# Altium PCB cal-boards-panelization1.PcbDoc
Units mm, origin at the board's own origin, x right, y up, seen from the top; angles counter-clockwise.
Board outline 207 x 174 mm, 4 copper layers (Top Layer, Mid-Layer 1, Mid-Layer 2, Bottom Layer), stack 1.105 mm thick; 6 components, 0 nets, 1432 pads, 0 vias.
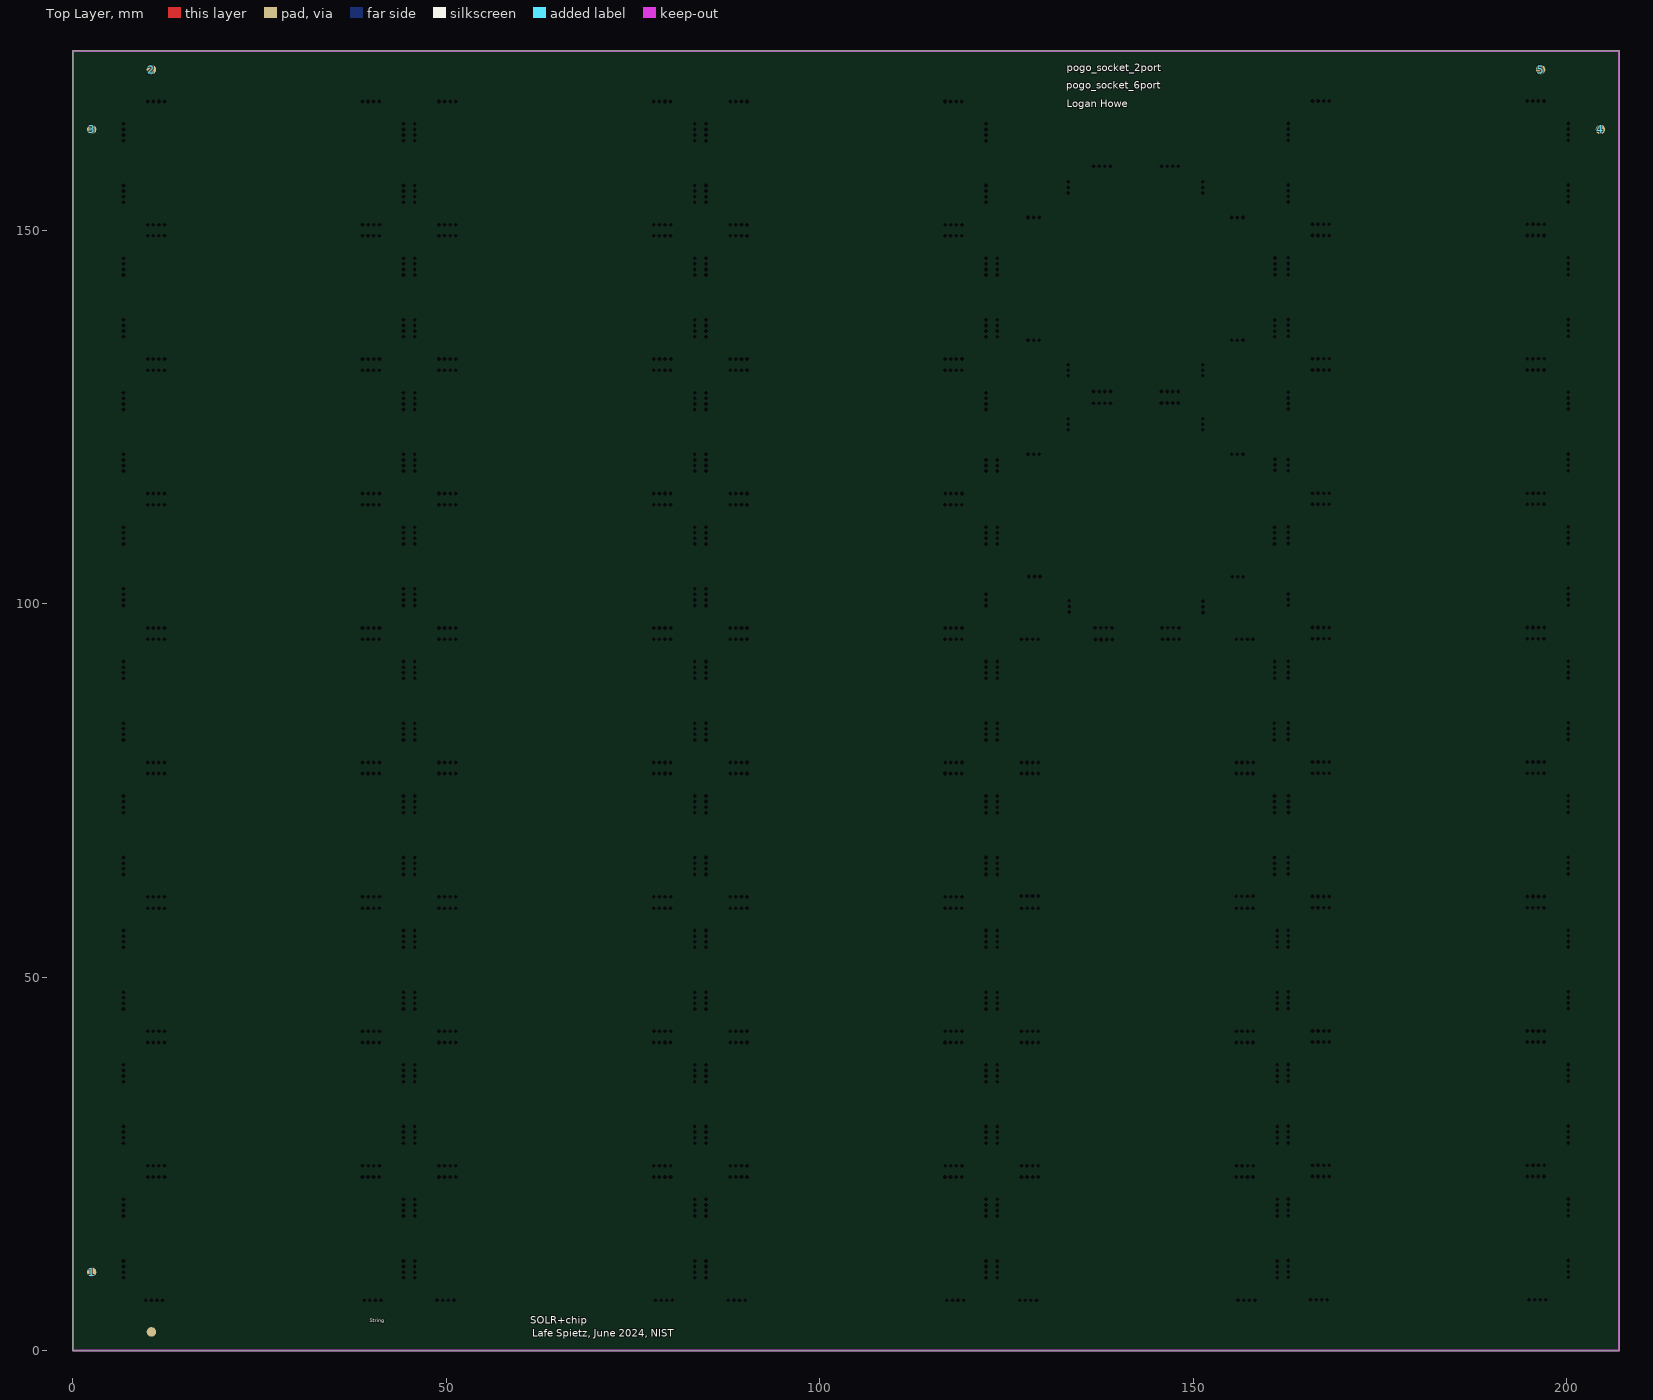
[diagram p0: Top Layer view]
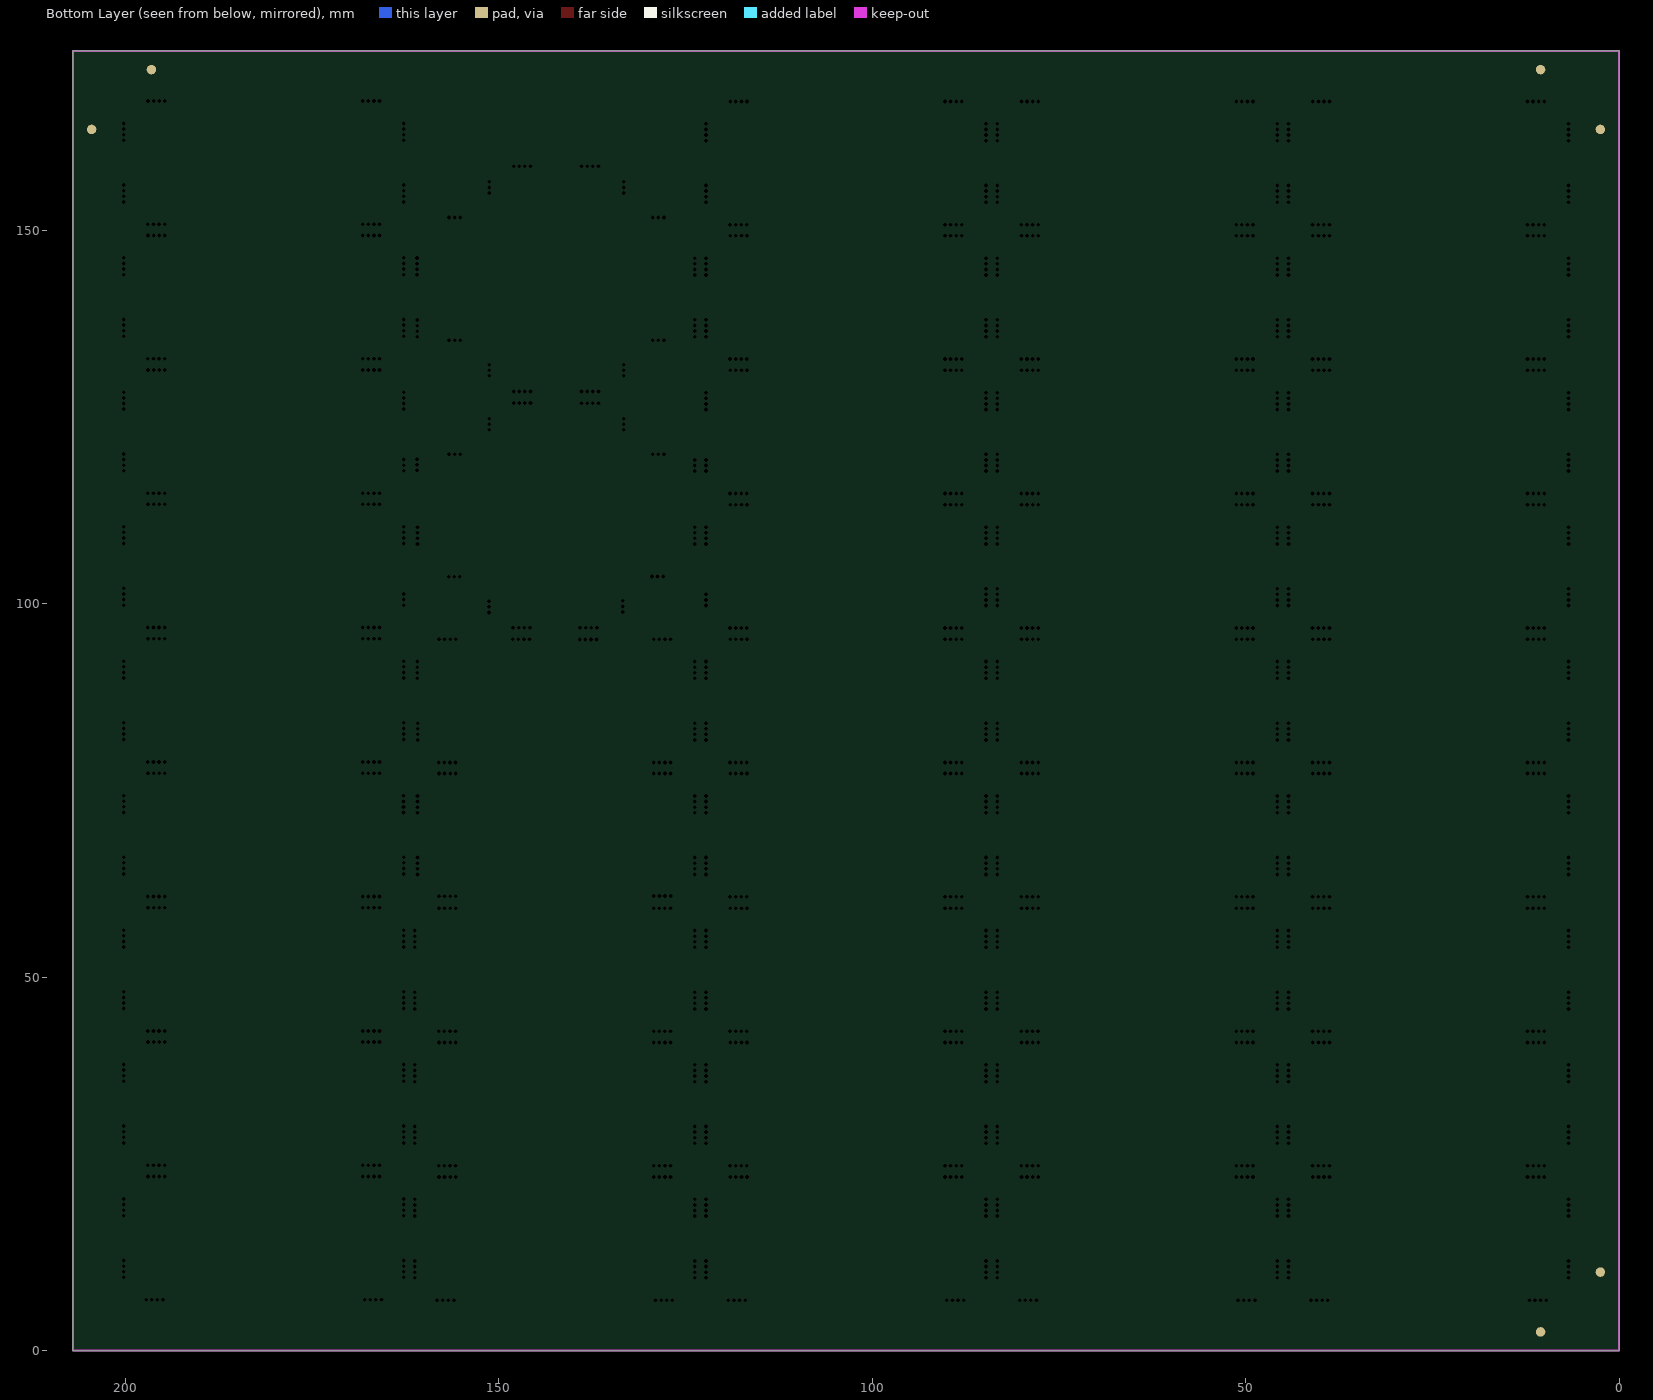
[diagram p1: Bottom Layer view, seen from below]

## Layer stack, top to bottom
Top Solder: solder mask 0.0254, SM-001, Dk 4
Top Layer: signal copper 0.035
Core1: dielectric 0.254, RO4350B, Dk 3.48
Mid-Layer 1: signal copper 0.035
Dielectric 1: prepreg 0.1778, PR7628, Dk 4.24
Dielectric 2: prepreg 0.1016, PR2116, Dk 4.17
Dielectric 3: prepreg 0.1778, PR7628, Dk 4.24
Mid-Layer 2: signal copper 0.035
Core2: dielectric 0.254, RO-4350B, Dk 3.48
Bottom Layer: signal copper 0.035
Bottom Solder: solder mask 0.0254, SM-001, Dk 4

## Board outline
0,0 0,174 207,174 207,0

## Design rules (kind name [scope] priority, off if disabled: settings)
Clearance [All] p1: gap=0.254 ignorepadtopadclearanceinfootprint=FALSE
PolygonConnect [All] p1: connectstyle=Relief reliefconductorwidth=0.254 reliefentries=4 polygonreliefangle="90 Angle" airgapwidth=0.254
RoutingVias [All] p1: holewidth=0.711 width=1.27 viastyle="Through Hole" minholewidth=0.711 minwidth=1.27 maxholewidth=0.711 maxwidth=1.27
SolderMaskExpansion [All] p1: expansion=0.102 istentingtop=FALSE
Width [All] p1: maxlimit=0.254 minlimit=0.254 preferedwidth=0.254
30 further rules are at their usual default settings.

## Components (designator, comment, footprint, x,y, rotation, side; value= is the part's Value field where it differs from the comment)
1 "Fiducial" fiducial 2.5,10.5 r0 top
2 "Fiducial" fiducial 10.5,171.5 r0 top
3 "Fiducial" fiducial 2.5,163.5 r0 top
4 "Fiducial" fiducial 204.5,163.5 r0 top
5 "Fiducial" fiducial 196.5,171.5 r0 top
? "Fiducial" fiducial 10.5,2.5 r0 top

## Footprints (in the part's own frame and the unit in brackets; to place one, negate y for a bottom-side part, rotate by r counter-clockwise, add the part's x,y. Pads: shape width x height; smd on the part's side, far side on the other; paste and mask are expansions set on the pad)
fiducial [mm]
  round 1.27 / inner round 0 / far side round 1.27 all layers, no hole paste-2539.97 mask+1.27: 1(0,0)

## Free pads (board coordinates)
  round 0 hole 0.5 unplated: 6(6.75,9.75) 6(6.75,10.5) 6(6.75,11.25) 6(6.75,12) 6(6.75,18) 6(6.75,18.75) 6(6.75,19.5) 6(6.75,20.25) 6(6.75,27.75) 6(6.75,28.5) 6(6.75,29.25) 6(6.75,30) 6(6.75,36) 6(6.75,36.75) 6(6.75,37.5) 6(6.75,38.25) 6(6.75,63.75) 6(6.75,64.5) 6(6.75,65.25) 6(6.75,66) 6(6.75,72) 6(6.75,72.75) 6(6.75,73.5) 6(6.75,74.25) 6(6.75,81.75) 6(6.75,82.5) 6(6.75,83.25) 6(6.75,84) 6(6.75,90) 6(6.75,90.75) 6(6.75,91.5) 6(6.75,92.25) 6(6.75,99.75) 6(6.75,100.5) 6(6.75,101.25) 6(6.75,102) 6(6.75,108) 6(6.75,108.75) 6(6.75,109.5) 6(6.75,110.25) 6(6.75,117.75) 6(6.75,118.5) 6(6.75,119.25) 6(6.75,120) 6(6.75,126) 6(6.75,126.75) 6(6.75,127.5) 6(6.75,128.25) 6(6.75,135.75) 6(6.75,136.5) 6(6.75,137.25) 6(6.75,138) 6(6.75,144) 6(6.75,144.75) 6(6.75,145.5) 6(6.75,146.25) 6(6.751,153.741) 6(6.751,154.491) 6(6.751,155.241) 6(6.751,155.991) 6(6.751,161.991) 6(6.751,162.741) 6(6.751,163.491) 6(6.751,164.241) 6(6.754,45.733) 6(6.754,46.483) 6(6.754,47.233) 6(6.754,47.983) 6(6.754,53.983) 6(6.754,54.733) 6(6.754,55.483) 6(6.754,56.233) 6(9.75,6.75) 6(10,23.25) 6(10,24.75) 6(10,41.25) 6(10,60.75) 6(10,77.25) 6(10,78.75) 6(10,95.25) 6(10,96.75) 6(10,113.25) 6(10,114.75) 6(10,131.25) 6(10,132.75) 6(10,149.25) 6(10.001,150.741) 6(10.001,167.241) 6(10.004,42.733) 6(10.004,59.233) 6(10.5,6.75) 6(10.75,23.25) 6(10.75,24.75) 6(10.75,41.25) 6(10.75,60.75) 6(10.75,77.25) 6(10.75,78.75) 6(10.75,95.25) 6(10.75,96.75) 6(10.75,113.25) 6(10.75,114.75) 6(10.75,131.25) 6(10.75,132.75) 6(10.75,149.25) 6(10.751,150.741) 6(10.751,167.241) 6(10.754,42.733) 6(10.754,59.233) 6(11.25,6.75) 6(11.5,23.25) 6(11.5,24.75) 6(11.5,41.25) 6(11.5,60.75) 6(11.5,77.25) 6(11.5,78.75) 6(11.5,95.25) 6(11.5,96.75) 6(11.5,113.25) 6(11.5,114.75) 6(11.5,131.25) 6(11.5,132.75) 6(11.5,149.25) 6(11.501,150.741) 6(11.501,167.241) 6(11.504,42.733) 6(11.504,59.233) 6(12,6.75) 6(12.25,23.25) 6(12.25,24.75) 6(12.25,41.25) 6(12.25,60.75) 6(12.25,77.25) 6(12.25,78.75) 6(12.25,95.25) 6(12.25,96.75) 6(12.25,113.25) 6(12.25,114.75) 6(12.25,131.25) 6(12.25,132.75) 6(12.25,149.25) 6(12.251,150.741) 6(12.251,167.241) 6(12.254,42.733) 6(12.254,59.233) 6(38.75,23.25) 6(38.75,41.25) 6(38.75,77.25) 6(38.75,95.25) 6(38.75,113.25) 6(38.75,131.25) 6(38.75,149.25) 6(38.751,167.241) 6(38.754,59.233) 6(38.775,24.75) 6(38.775,60.75) 6(38.775,78.75) 6(38.775,96.75) 6(38.775,114.75) 6(38.775,132.75) 6(38.776,150.741) 6(38.779,42.733) 6(39,6.75) 6(39.5,23.25) 6(39.5,41.25) 6(39.5,77.25) 6(39.5,95.25) 6(39.5,113.25) 6(39.5,131.25) 6(39.5,149.25) 6(39.501,167.241) 6(39.504,59.233) 6(39.525,24.75) 6(39.525,60.75) 6(39.525,78.75) 6(39.525,96.75) 6(39.525,114.75) 6(39.525,132.75) 6(39.526,150.741) 6(39.529,42.733) 6(39.75,6.75) 6(40.25,23.25) 6(40.25,41.25) 6(40.25,77.25) 6(40.25,95.25) 6(40.25,113.25) 6(40.25,131.25) 6(40.25,149.25) 6(40.251,167.241) 6(40.254,59.233) 6(40.275,24.75) 6(40.275,60.75) 6(40.275,78.75) 6(40.275,96.75) 6(40.275,114.75) 6(40.275,132.75) 6(40.276,150.741) 6(40.279,42.733) 6(40.5,6.75) 6(41,23.25) 6(41,41.25) 6(41,77.25) 6(41,95.25) 6(41,113.25) 6(41,131.25) 6(41,149.25) 6(41.001,167.241) 6(41.004,59.233) 6(41.025,24.75) 6(41.025,60.75) 6(41.025,78.75) 6(41.025,96.75) 6(41.025,114.75) 6(41.025,132.75) 6(41.026,150.741) 6(41.029,42.733) 6(41.25,6.75) 6(44.25,9.75) 6(44.25,10.5) 6(44.25,11.25) 6(44.25,12) 6(44.25,18) 6(44.25,18.75) 6(44.25,19.5) 6(44.25,20.25) 6(44.25,27.75) 6(44.25,28.5) 6(44.25,29.25) 6(44.25,30) 6(44.25,36) 6(44.25,36.75) 6(44.25,37.5) 6(44.25,38.25) 6(44.25,63.75) 6(44.25,64.5) 6(44.25,65.25) 6(44.25,66) 6(44.25,72) 6(44.25,72.75) 6(44.25,73.5) 6(44.25,74.25) 6(44.25,81.75) 6(44.25,82.5) 6(44.25,83.25) 6(44.25,84) 6(44.25,90) 6(44.25,90.75) 6(44.25,91.5) 6(44.25,92.25) 6(44.25,99.75) 6(44.25,100.5) 6(44.25,101.25) 6(44.25,102) 6(44.25,108) 6(44.25,108.75) 6(44.25,109.5) 6(44.25,110.25) 6(44.25,117.75) 6(44.25,118.5) 6(44.25,119.25) 6(44.25,120) 6(44.25,126) 6(44.25,126.75) 6(44.25,127.5) 6(44.25,128.25) 6(44.25,135.75) 6(44.25,136.5) 6(44.25,137.25) 6(44.25,138) 6(44.25,144) 6(44.25,144.75) 6(44.25,145.5) 6(44.25,146.25) 6(44.251,153.741) 6(44.251,154.491) 6(44.251,155.241) 6(44.251,155.991) 6(44.251,161.991) 6(44.251,162.741) 6(44.251,163.491) 6(44.251,164.241) 6(44.254,45.733) 6(44.254,46.483) 6(44.254,47.233) 6(44.254,47.983) 6(44.254,53.983) 6(44.254,54.733) 6(44.254,55.483) 6(44.254,56.233) 6(45.75,9.75) 6(45.75,10.5) 6(45.75,11.25) 6(45.75,12) 6(45.75,18) 6(45.75,18.75) 6(45.75,19.5) 6(45.75,20.25) 6(45.75,27.75) 6(45.75,28.5) 6(45.75,29.25) 6(45.75,30) 6(45.75,36) 6(45.75,36.75) 6(45.75,37.5) 6(45.75,38.25) 6(45.75,63.75) 6(45.75,64.5) 6(45.75,65.25) 6(45.75,66) 6(45.75,72) 6(45.75,72.75) 6(45.75,73.5) 6(45.75,74.25) 6(45.75,81.75) 6(45.75,82.5) 6(45.75,83.25) 6(45.75,84) 6(45.75,90) 6(45.75,90.75) 6(45.75,91.5) 6(45.75,92.25) 6(45.75,99.75) 6(45.75,100.5) 6(45.75,101.25) 6(45.75,102) 6(45.75,108) 6(45.75,108.75) 6(45.75,109.5) 6(45.75,110.25) 6(45.75,117.75) 6(45.75,118.5) 6(45.75,119.25) 6(45.75,120) 6(45.75,126) 6(45.75,126.75) 6(45.75,127.5) 6(45.75,128.25) 6(45.75,135.75) 6(45.75,136.5) 6(45.75,137.25) 6(45.75,138) 6(45.75,144) 6(45.75,144.75) 6(45.75,145.5) 6(45.75,146.25) 6(45.751,153.741) 6(45.751,154.491) 6(45.751,155.241) 6(45.751,155.991) 6(45.751,161.991) 6(45.751,162.741) 6(45.751,163.491) 6(45.751,164.241) 6(45.754,45.733) 6(45.754,46.483) 6(45.754,47.233) 6(45.754,47.983) 6(45.754,53.983) 6(45.754,54.733) 6(45.754,55.483) 6(45.754,56.233) 6(48.75,6.75) 6(49,23.25) 6(49,24.75) 6(49,41.25) 6(49,60.75) 6(49,77.25) 6(49,78.75) 6(49,95.25) 6(49,96.75) 6(49,113.25) 6(49,114.75) 6(49,131.25) 6(49,132.75) 6(49,149.25) 6(49.001,150.741) 6(49.001,167.241) 6(49.004,42.733) 6(49.004,59.233) 6(49.5,6.75) 6(49.75,23.25) 6(49.75,24.75) 6(49.75,41.25) 6(49.75,60.75) 6(49.75,77.25) 6(49.75,78.75) 6(49.75,95.25) 6(49.75,96.75) 6(49.75,113.25) 6(49.75,114.75) 6(49.75,131.25) 6(49.75,132.75) 6(49.75,149.25) 6(49.751,150.741) 6(49.751,167.241) 6(49.754,42.733) 6(49.754,59.233) 6(50.25,6.75) 6(50.5,23.25) 6(50.5,24.75) 6(50.5,41.25) 6(50.5,60.75) 6(50.5,77.25) 6(50.5,78.75) 6(50.5,95.25) 6(50.5,96.75) 6(50.5,113.25) 6(50.5,114.75) 6(50.5,131.25) 6(50.5,132.75) 6(50.5,149.25) 6(50.501,150.741) 6(50.501,167.241) 6(50.504,42.733) 6(50.504,59.233) 6(51,6.75) 6(51.25,23.25) 6(51.25,24.75) 6(51.25,41.25) 6(51.25,60.75) 6(51.25,77.25) 6(51.25,78.75) 6(51.25,95.25) 6(51.25,96.75) 6(51.25,113.25) 6(51.25,114.75) 6(51.25,131.25) 6(51.25,132.75) 6(51.25,149.25) 6(51.251,150.741) 6(51.251,167.241) 6(51.254,42.733) 6(51.254,59.233) 6(77.75,23.25) 6(77.75,41.25) 6(77.75,77.25) 6(77.75,95.25) 6(77.75,113.25) 6(77.75,131.25) 6(77.75,149.25) 6(77.751,167.241) 6(77.754,59.233) 6(77.775,24.75) 6(77.775,60.75) 6(77.775,78.75) 6(77.775,96.75) 6(77.775,114.75) 6(77.775,132.75) 6(77.776,150.741) 6(77.779,42.733) 6(78,6.75) 6(78.5,23.25) 6(78.5,41.25) 6(78.5,77.25) 6(78.5,95.25) 6(78.5,113.25) 6(78.5,131.25) 6(78.5,149.25) 6(78.501,167.241) 6(78.504,59.233) 6(78.525,24.75) 6(78.525,60.75) 6(78.525,78.75) 6(78.525,96.75) 6(78.525,114.75) 6(78.525,132.75) 6(78.526,150.741) 6(78.529,42.733) 6(78.75,6.75) 6(79.25,23.25) 6(79.25,41.25) 6(79.25,77.25) 6(79.25,95.25) 6(79.25,113.25) 6(79.25,131.25) 6(79.25,149.25) 6(79.251,167.241) 6(79.254,59.233) 6(79.275,24.75) 6(79.275,60.75) 6(79.275,78.75) 6(79.275,96.75) 6(79.275,114.75) 6(79.275,132.75) 6(79.276,150.741) 6(79.279,42.733) 6(79.5,6.75) 6(80,23.25) 6(80,41.25) 6(80,77.25) 6(80,95.25) 6(80,113.25) 6(80,131.25) 6(80,149.25) 6(80.001,167.241) 6(80.004,59.233) 6(80.025,24.75) 6(80.025,60.75) 6(80.025,78.75) 6(80.025,96.75) 6(80.025,114.75) 6(80.025,132.75) 6(80.026,150.741) 6(80.029,42.733) 6(80.25,6.75) 6(83.25,9.75) 6(83.25,10.5) 6(83.25,11.25) 6(83.25,12) 6(83.25,18) 6(83.25,18.75) 6(83.25,19.5) 6(83.25,20.25) 6(83.25,27.75) 6(83.25,28.5) 6(83.25,29.25) 6(83.25,30) 6(83.25,36) 6(83.25,36.75) 6(83.25,37.5) 6(83.25,38.25) 6(83.25,63.75) 6(83.25,64.5) 6(83.25,65.25) 6(83.25,66) 6(83.25,72) 6(83.25,72.75) 6(83.25,73.5) 6(83.25,74.25) 6(83.25,81.75) 6(83.25,82.5) 6(83.25,83.25) 6(83.25,84) 6(83.25,90) 6(83.25,90.75) 6(83.25,91.5) 6(83.25,92.25) 6(83.25,99.75) 6(83.25,100.5) 6(83.25,101.25) 6(83.25,102) 6(83.25,108) 6(83.25,108.75) 6(83.25,109.5) 6(83.25,110.25) 6(83.25,117.75) 6(83.25,118.5) 6(83.25,119.25) 6(83.25,120) 6(83.25,126) 6(83.25,126.75) 6(83.25,127.5) 6(83.25,128.25) 6(83.25,135.75) 6(83.25,136.5) 6(83.25,137.25) 6(83.25,138) 6(83.25,144) 6(83.25,144.75) 6(83.25,145.5) 6(83.25,146.25) 6(83.251,153.741) 6(83.251,154.491) 6(83.251,155.241) 6(83.251,155.991) 6(83.251,161.991) 6(83.251,162.741) 6(83.251,163.491) 6(83.251,164.241) 6(83.254,45.733) 6(83.254,46.483) 6(83.254,47.233) 6(83.254,47.983) 6(83.254,53.983) 6(83.254,54.733) 6(83.254,55.483) 6(83.254,56.233) 6(84.75,9.75) 6(84.75,10.5) 6(84.75,11.25) 6(84.75,12) 6(84.75,18) 6(84.75,18.75) 6(84.75,19.5) 6(84.75,20.25) 6(84.75,27.75) 6(84.75,28.5) 6(84.75,29.25) 6(84.75,30) 6(84.75,36) 6(84.75,36.75) 6(84.75,37.5) 6(84.75,38.25) 6(84.75,63.75) 6(84.75,64.5) 6(84.75,65.25) 6(84.75,66) 6(84.75,72) 6(84.75,72.75) 6(84.75,73.5) 6(84.75,74.25) 6(84.75,81.75) 6(84.75,82.5) 6(84.75,83.25) 6(84.75,84) 6(84.75,90) 6(84.75,90.75) 6(84.75,91.5) 6(84.75,92.25) 6(84.75,99.75) 6(84.75,100.5) 6(84.75,101.25) 6(84.75,102) 6(84.75,108) 6(84.75,108.75) 6(84.75,109.5) 6(84.75,110.25) 6(84.75,117.75) 6(84.75,118.5) 6(84.75,119.25) 6(84.75,120) 6(84.75,126) 6(84.75,126.75) 6(84.75,127.5) 6(84.75,128.25) 6(84.75,135.75) 6(84.75,136.5) 6(84.75,137.25) 6(84.75,138) 6(84.75,144) 6(84.75,144.75) 6(84.75,145.5) 6(84.75,146.25) 6(84.751,153.741) 6(84.751,154.491) 6(84.751,155.241) 6(84.751,155.991) 6(84.751,161.991) 6(84.751,162.741) 6(84.751,163.491) 6(84.751,164.241) 6(84.754,45.733) 6(84.754,46.483) 6(84.754,47.233) 6(84.754,47.983) 6(84.754,53.983) 6(84.754,54.733) 6(84.754,55.483) 6(84.754,56.233) 6(87.75,6.75) 6(88,23.25) 6(88,24.75) 6(88,41.25) 6(88,60.75) 6(88,77.25) 6(88,78.75) 6(88,95.25) 6(88,96.75) 6(88,113.25) 6(88,114.75) 6(88,131.25) 6(88,132.75) 6(88,149.25) 6(88.001,150.741) 6(88.001,167.241) 6(88.004,42.733) 6(88.004,59.233) 6(88.5,6.75) 6(88.75,23.25) 6(88.75,24.75) 6(88.75,41.25) 6(88.75,60.75) 6(88.75,77.25) 6(88.75,78.75) 6(88.75,95.25) 6(88.75,96.75) 6(88.75,113.25) 6(88.75,114.75) 6(88.75,131.25) 6(88.75,132.75) 6(88.75,149.25) 6(88.751,150.741) 6(88.751,167.241) 6(88.754,42.733) 6(88.754,59.233) 6(89.25,6.75) 6(89.5,23.25) 6(89.5,24.75) 6(89.5,41.25) 6(89.5,60.75) 6(89.5,77.25) 6(89.5,78.75) 6(89.5,95.25) 6(89.5,96.75) 6(89.5,113.25) 6(89.5,114.75) 6(89.5,131.25) 6(89.5,132.75) 6(89.5,149.25) 6(89.501,150.741) 6(89.501,167.241) 6(89.504,42.733) 6(89.504,59.233) 6(90,6.75) 6(90.25,23.25) 6(90.25,24.75) 6(90.25,41.25) 6(90.25,60.75) 6(90.25,77.25) 6(90.25,78.75) 6(90.25,95.25) 6(90.25,96.75) 6(90.25,113.25) 6(90.25,114.75) 6(90.25,131.25) 6(90.25,132.75) 6(90.25,149.25) 6(90.251,150.741) 6(90.251,167.241) 6(90.254,42.733) 6(90.254,59.233) 6(116.75,23.25) 6(116.75,41.25) 6(116.75,77.25) 6(116.75,95.25) 6(116.75,113.25) 6(116.75,131.25) 6(116.75,149.25) 6(116.751,167.241) 6(116.754,59.233) 6(116.775,24.75) 6(116.775,60.75) 6(116.775,78.75) 6(116.775,96.75) 6(116.775,114.75) 6(116.775,132.75) 6(116.776,150.741) 6(116.779,42.733) 6(117,6.75) 6(117.5,23.25) 6(117.5,41.25) 6(117.5,77.25) 6(117.5,95.25) 6(117.5,113.25) 6(117.5,131.25) 6(117.5,149.25) 6(117.501,167.241) 6(117.504,59.233) 6(117.525,24.75) 6(117.525,60.75) 6(117.525,78.75) 6(117.525,96.75) 6(117.525,114.75) 6(117.525,132.75) 6(117.526,150.741) 6(117.529,42.733) 6(117.75,6.75) 6(118.25,23.25) 6(118.25,41.25) 6(118.25,77.25) 6(118.25,95.25) 6(118.25,113.25) 6(118.25,131.25) 6(118.25,149.25) 6(118.251,167.241) 6(118.254,59.233) 6(118.275,24.75) 6(118.275,60.75) 6(118.275,78.75) 6(118.275,96.75) 6(118.275,114.75) 6(118.275,132.75) 6(118.276,150.741) 6(118.279,42.733) 6(118.5,6.75) 6(119,23.25) 6(119,41.25) 6(119,77.25) 6(119,95.25) 6(119,113.25) 6(119,131.25) 6(119,149.25) 6(119.001,167.241) 6(119.004,59.233) 6(119.025,24.75) 6(119.025,60.75) 6(119.025,78.75) 6(119.025,96.75) 6(119.025,114.75) 6(119.025,132.75) 6(119.026,150.741) 6(119.029,42.733) 6(119.25,6.75) 6(122.25,9.75) 6(122.25,10.5) 6(122.25,11.25) 6(122.25,12) 6(122.25,18) 6(122.25,18.75) 6(122.25,19.5) 6(122.25,20.25) 6(122.25,27.75) 6(122.25,28.5) 6(122.25,29.25) 6(122.25,30) 6(122.25,36) 6(122.25,36.75) 6(122.25,37.5) 6(122.25,38.25) 6(122.25,63.75) 6(122.25,64.5) 6(122.25,65.25) 6(122.25,66) 6(122.25,72) 6(122.25,72.75) 6(122.25,73.5) 6(122.25,74.25) 6(122.25,81.75) 6(122.25,82.5) 6(122.25,83.25) 6(122.25,84) 6(122.25,90) 6(122.25,90.75) 6(122.25,91.5) 6(122.25,92.25) 6(122.25,99.75) 6(122.25,100.5) 6(122.25,101.25) 6(122.25,108) 6(122.25,108.75) 6(122.25,109.5) 6(122.25,110.25) 6(122.25,117.75) 6(122.25,118.5) 6(122.25,119.25) 6(122.25,126) 6(122.25,126.75) 6(122.25,127.5) 6(122.25,128.25) 6(122.25,135.75) 6(122.25,136.5) 6(122.25,137.25) 6(122.25,138) 6(122.25,144) 6(122.25,144.75) 6(122.25,145.5) 6(122.25,146.25) 6(122.251,153.741) 6(122.251,154.491) 6(122.251,155.241) 6(122.251,155.991) 6(122.251,161.991) 6(122.251,162.741) 6(122.251,163.491) 6(122.251,164.241) 6(122.254,45.733) 6(122.254,46.483) 6(122.254,47.233) 6(122.254,47.983) 6(122.254,53.983) 6(122.254,54.733) 6(122.254,55.483) 6(122.254,56.233) 6(123.75,9.75) 6(123.75,10.5) 6(123.75,11.25) 6(123.75,12) 6(123.75,18) 6(123.75,18.75) 6(123.75,19.5) 6(123.75,20.25) 6(123.75,27.75) 6(123.75,28.5) 6(123.75,29.25) 6(123.75,30) 6(123.75,36) 6(123.75,36.75) 6(123.75,37.5) 6(123.75,38.25) 6(123.75,63.75) 6(123.75,64.5) 6(123.75,65.25) 6(123.75,66) 6(123.75,72) 6(123.75,72.75) 6(123.75,73.5) 6(123.75,74.25) 6(123.75,81.75) 6(123.75,82.5) 6(123.75,83.25) 6(123.75,84) 6(123.75,90) 6(123.75,90.75) 6(123.75,91.5) 6(123.75,92.25) 6(123.75,108) 6(123.75,108.75) 6(123.75,109.5) 6(123.75,110.25) 6(123.75,117.75) 6(123.75,118.5) 6(123.75,119.25) 6(123.75,135.75) 6(123.75,136.5) 6(123.75,137.25) 6(123.75,138) 6(123.75,144) 6(123.75,144.75) 6(123.75,145.5) 6(123.75,146.25) 6(123.754,45.733) 6(123.754,46.483) 6(123.754,47.233) 6(123.754,47.983) 6(123.754,53.983) 6(123.754,54.733) 6(123.754,55.483) 6(123.754,56.233) 6(126.75,6.75) 6(126.975,60.85) 6(127,23.25) 6(127,24.75) 6(127,41.25) 6(127,77.25) 6(127,78.75) 6(127,95.25) 6(127.004,42.733) 6(127.004,59.233) 6(127.5,6.75) 6(127.725,60.85) 6(127.75,23.25) 6(127.75,24.75) 6(127.75,41.25) 6(127.75,77.25) 6(127.75,78.75) 6(127.75,95.25) 6(127.754,42.733) 6(127.754,59.233) 6(127.875,120) 6(127.875,135.275) 6(127.875,151.7) 6(127.975,103.65) 6(128.25,6.75) 6(128.475,60.85) 6(128.5,23.25) 6(128.5,24.75) 6(128.5,41.25) 6(128.5,77.25) 6(128.5,78.75) 6(128.5,95.25) 6(128.504,42.733) 6(128.504,59.233) 6(128.625,120) 6(128.625,135.275) 6(128.625,151.7) 6(128.725,103.65) 6(129,6.75) 6(129.225,60.85) 6(129.25,23.25) 6(129.25,24.75) 6(129.25,41.25) 6(129.25,77.25) 6(129.25,78.75) 6(129.25,95.25) 6(129.254,42.733) 6(129.254,59.233) 6(129.375,120) 6(129.375,135.275) 6(129.375,151.7) 6(129.475,103.65) 6(133.275,123.275) 6(133.275,124.025) 6(133.275,124.775) 6(133.275,130.5) 6(133.275,131.25) 6(133.275,132) 6(133.275,154.975) 6(133.275,155.725) 6(133.275,156.475) 6(133.375,98.875) 6(133.375,99.625) 6(133.375,100.375) 6(136.65,126.85) 6(136.65,128.4) 6(136.65,158.575) 6(136.85,96.775) 6(136.9,95.2) 6(137.4,126.85) 6(137.4,128.4) 6(137.4,158.575) 6(137.6,96.775) 6(137.65,95.2) 6(138.15,126.85) 6(138.15,128.4) 6(138.15,158.575) 6(138.35,96.775) 6(138.4,95.2) 6(138.9,126.85) 6(138.9,128.4) 6(138.9,158.575) 6(139.1,96.775) 6(139.15,95.2) 6(145.75,126.875) 6(145.75,128.4) 6(145.75,158.575) 6(145.825,96.775) 6(145.875,95.225) 6(146.5,126.875) 6(146.5,128.4) 6(146.5,158.575) 6(146.575,96.775) 6(146.625,95.225) 6(147.25,126.875) 6(147.25,128.4) 6(147.25,158.575) 6(147.325,96.775) 6(147.375,95.225) 6(148,126.875) 6(148,128.4) 6(148,158.575) 6(148.075,96.775) 6(148.125,95.225) 6(151.25,123.275) 6(151.25,124.025) 6(151.25,124.775) 6(151.25,130.5) 6(151.25,131.25) 6(151.25,132) 6(151.25,154.975) 6(151.25,155.725) 6(151.25,156.475) 6(151.3,98.825) 6(151.3,99.575) 6(151.3,100.325) 6(155.15,120) 6(155.15,135.275) 6(155.15,151.7) 6(155.2,103.6) 6(155.75,23.25) 6(155.75,41.25) 6(155.75,60.825) 6(155.75,77.25) 6(155.75,95.25) 6(155.754,59.233) 6(155.775,24.75) 6(155.775,78.75) 6(155.779,42.733) 6(155.9,120) 6(155.9,135.275) 6(155.9,151.7) 6(155.95,103.6) 6(156,6.75) 6(156.5,23.25) 6(156.5,41.25) 6(156.5,60.825) 6(156.5,77.25) 6(156.5,95.25) 6(156.504,59.233) 6(156.525,24.75) 6(156.525,78.75) 6(156.529,42.733) 6(156.65,120) 6(156.65,135.275) 6(156.65,151.7) 6(156.7,103.6) 6(156.75,6.75) 6(157.25,23.25) 6(157.25,41.25) 6(157.25,60.825) 6(157.25,77.25) 6(157.25,95.25) 6(157.254,59.233) 6(157.275,24.75) 6(157.275,78.75) 6(157.279,42.733) 6(157.5,6.75) 6(158,23.25) 6(158,41.25) 6(158,60.825) 6(158,77.25) 6(158,95.25) 6(158.004,59.233) 6(158.025,24.75) 6(158.025,78.75) 6(158.029,42.733) 6(158.25,6.75) 6(160.85,81.75) 6(160.85,82.5) 6(160.85,83.25) 6(160.85,84) 6(160.875,63.75) 6(160.875,64.5) 6(160.875,65.25) 6(160.875,66) 6(160.875,72) 6(160.875,72.75) 6(160.875,73.5) 6(160.875,74.25) 6(160.875,108) 6(160.875,108.75) 6(160.875,109.5) 6(160.875,110.25) 6(160.9,90) 6(160.9,90.75) 6(160.9,91.5) 6(160.9,92.25) 6(160.9,135.725) 6(160.9,136.475) 6(160.9,137.225) 6(160.9,137.975) 6(160.925,117.85) 6(160.925,118.6) 6(160.925,119.35) 6(160.925,144.025) 6(160.925,144.775) 6(160.925,145.525) 6(160.925,146.275) 6(161.25,9.75) 6(161.25,10.5) 6(161.25,11.25) 6(161.25,12) 6(161.25,18) 6(161.25,18.75) 6(161.25,19.5) 6(161.25,20.25) 6(161.25,27.75) 6(161.25,28.5) 6(161.25,29.25) 6(161.25,30) 6(161.25,36) 6(161.25,36.75) 6(161.25,37.5) 6(161.25,38.25) 6(161.254,45.733) 6(161.254,46.483) 6(161.254,47.233) 6(161.254,47.983) 6(161.254,53.983) 6(161.254,54.733) 6(161.254,55.483) 6(161.254,56.233) 6(162.7,9.8) 6(162.7,10.55) 6(162.7,11.3) 6(162.7,12.05) 6(162.7,18.05) 6(162.7,18.8) 6(162.7,19.55) 6(162.7,20.3) 6(162.7,27.8) 6(162.7,28.55) 6(162.7,29.3) 6(162.7,30.05) 6(162.7,36.05) 6(162.7,36.8) 6(162.7,37.55) 6(162.7,38.3) 6(162.7,63.8) 6(162.7,64.55) 6(162.7,65.3) 6(162.7,66.05) 6(162.7,81.8) 6(162.7,82.55) 6(162.7,83.3) 6(162.7,84.05) 6(162.7,90.05) 6(162.7,90.8) 6(162.7,91.55) 6(162.7,92.3) 6(162.7,99.8) 6(162.7,100.55) 6(162.7,101.3) 6(162.7,108.05) 6(162.7,108.8) 6(162.7,109.55) 6(162.7,110.3) 6(162.7,117.8) 6(162.7,118.55) 6(162.7,119.3) 6(162.7,126.05) 6(162.7,126.8) 6(162.7,127.55) 6(162.7,128.3) 6(162.7,135.8) 6(162.7,136.55) 6(162.7,137.3) 6(162.7,138.05) 6(162.7,144.05) 6(162.7,144.8) 6(162.7,145.55) 6(162.7,146.3) 6(162.701,153.791) 6(162.701,154.541) 6(162.701,155.291) 6(162.701,156.041) 6(162.701,162.041) 6(162.701,162.791) 6(162.701,163.541) 6(162.701,164.291) 6(162.704,45.783) 6(162.704,46.533) 6(162.704,47.283) 6(162.704,48.033) 6(162.704,54.033) 6(162.704,54.783) 6(162.704,55.533) 6(162.704,56.283) 6(162.75,72.025) 6(162.75,72.775) 6(162.75,73.525) 6(162.75,74.275) 6(165.7,6.8) 6(165.95,23.3) 6(165.95,24.8) 6(165.95,41.3) 6(165.95,60.8) 6(165.95,77.3) 6(165.95,78.8) 6(165.95,95.3) 6(165.95,96.8) 6(165.95,113.3) 6(165.95,114.8) 6(165.95,131.3) 6(165.95,132.8) 6(165.95,149.3) 6(165.951,150.791) 6(165.951,167.291) 6(165.954,42.783) 6(165.954,59.283) 6(166.45,6.8) 6(166.7,23.3) 6(166.7,24.8) 6(166.7,41.3) 6(166.7,60.8) 6(166.7,77.3) 6(166.7,78.8) 6(166.7,95.3) 6(166.7,96.8) 6(166.7,113.3) 6(166.7,114.8) 6(166.7,131.3) 6(166.7,132.8) 6(166.7,149.3) 6(166.701,150.791) 6(166.701,167.291) 6(166.704,42.783) 6(166.704,59.283) 6(167.2,6.8) 6(167.45,23.3) 6(167.45,24.8) 6(167.45,41.3) 6(167.45,60.8) 6(167.45,77.3) 6(167.45,78.8) 6(167.45,95.3) 6(167.45,96.8) 6(167.45,113.3) 6(167.45,114.8) 6(167.45,131.3) 6(167.45,132.8) 6(167.45,149.3) 6(167.451,150.791) 6(167.451,167.291) 6(167.454,42.783) 6(167.454,59.283) 6(167.95,6.8) 6(168.2,23.3) 6(168.2,24.8) 6(168.2,41.3) 6(168.2,60.8) 6(168.2,77.3) 6(168.2,78.8) 6(168.2,95.3) 6(168.2,96.8) 6(168.2,113.3) 6(168.2,114.8) 6(168.2,131.3) 6(168.2,132.8) 6(168.2,149.3) 6(168.201,150.791) 6(168.201,167.291) 6(168.204,42.783) 6(168.204,59.283) 6(194.7,23.3) 6(194.7,41.3) 6(194.7,77.3) 6(194.7,95.3) 6(194.7,113.3) 6(194.7,131.3) 6(194.7,149.3) 6(194.701,167.291) 6(194.704,59.283) 6(194.725,24.8) 6(194.725,60.8) 6(194.725,78.8) 6(194.725,96.8) 6(194.725,114.8) 6(194.725,132.8) 6(194.726,150.791) 6(194.729,42.783) 6(194.95,6.8) 6(195.45,23.3) 6(195.45,41.3) 6(195.45,77.3) 6(195.45,95.3) 6(195.45,113.3) 6(195.45,131.3) 6(195.45,149.3) 6(195.451,167.291) 6(195.454,59.283) 6(195.475,24.8) 6(195.475,60.8) 6(195.475,78.8) 6(195.475,96.8) 6(195.475,114.8) 6(195.475,132.8) 6(195.476,150.791) 6(195.479,42.783) 6(195.7,6.8) 6(196.2,23.3) 6(196.2,41.3) 6(196.2,77.3) 6(196.2,95.3) 6(196.2,113.3) 6(196.2,131.3) 6(196.2,149.3) 6(196.201,167.291) 6(196.204,59.283) 6(196.225,24.8) 6(196.225,60.8) 6(196.225,78.8) 6(196.225,96.8) 6(196.225,114.8) 6(196.225,132.8) 6(196.226,150.791) 6(196.229,42.783) 6(196.45,6.8) 6(196.95,23.3) 6(196.95,41.3) 6(196.95,77.3) 6(196.95,95.3) 6(196.95,113.3) 6(196.95,131.3) 6(196.95,149.3) 6(196.951,167.291) 6(196.954,59.283) 6(196.975,24.8) 6(196.975,60.8) 6(196.975,78.8) 6(196.975,96.8) 6(196.975,114.8) 6(196.975,132.8) 6(196.976,150.791) 6(196.979,42.783) 6(197.2,6.8) 6(200.2,9.8) 6(200.2,10.55) 6(200.2,11.3) 6(200.2,12.05) 6(200.2,18.05) 6(200.2,18.8) 6(200.2,19.55) 6(200.2,20.3) 6(200.2,27.8) 6(200.2,28.55) 6(200.2,29.3) 6(200.2,30.05) 6(200.2,36.05) 6(200.2,36.8) 6(200.2,37.55) 6(200.2,38.3) 6(200.2,63.8) 6(200.2,64.55) 6(200.2,65.3) 6(200.2,66.05) 6(200.2,72.05) 6(200.2,72.8) 6(200.2,73.55) 6(200.2,74.3) 6(200.2,81.8) 6(200.2,82.55) 6(200.2,83.3) 6(200.2,84.05) 6(200.2,90.05) 6(200.2,90.8) 6(200.2,91.55) 6(200.2,92.3) 6(200.2,99.8) 6(200.2,100.55) 6(200.2,101.3) 6(200.2,102.05) 6(200.2,108.05) 6(200.2,108.8) 6(200.2,109.55) 6(200.2,110.3) 6(200.2,117.8) 6(200.2,118.55) 6(200.2,119.3) 6(200.2,120.05) 6(200.2,126.05) 6(200.2,126.8) 6(200.2,127.55) 6(200.2,128.3) 6(200.2,135.8) 6(200.2,136.55) 6(200.2,137.3) 6(200.2,138.05) 6(200.2,144.05) 6(200.2,144.8) 6(200.2,145.55) 6(200.2,146.3) 6(200.201,153.791) 6(200.201,154.541) 6(200.201,155.291) 6(200.201,156.041) 6(200.201,162.041) 6(200.201,162.791) 6(200.201,163.541) 6(200.201,164.291) 6(200.204,45.783) 6(200.204,46.533) 6(200.204,47.283) 6(200.204,48.033) 6(200.204,54.033) 6(200.204,54.783) 6(200.204,55.533) 6(200.204,56.283)

## Nets (pads, with @x,y where several pads share a name; then routed paths per layer and width w, separated by ;. In a path a pad name is that pad's centre, name@x,y a point inside that pad or via, vN(x,y) a via of type N, cw(c..) or ccw(c..) an arc to the next point about the centre after c; other vN are vias at no path point)
pads on no net: 1.1 2.1 3.1 4.1 5.1 ?.1

## Keep-outs
Keep-Out Layer:
  the board outline again, w0.254

## Silkscreen, mask and mechanical layers (free items; w line width, h text height)
Top Overlay:
  text "pogo_socket_2port" at 133.029,171.312 h1
  text "pogo_socket_6port" at 133.019,168.919 h1
  text "Logan Howe" at 133.029,166.462 h1
  text "String" at 39.752,3.819 h0.5
  text "SOLR+chip" at 61.254,3.587 h1
  text "Lafe Spietz, June 2024, NIST" at 61.469,1.817 h1
milling:
  drawing of 282 lines, arcs and shapes, not listed

## Panel: embedded boards
"\\grumpy\volt\howe\novel_devices\kit\pcbs\pogo_socket_pcb\240611_eurocircuits_panel_FINAL\pogo_socket_6port.PcbDoc" at 124,97, 2 rows x 1 columns, spacing 31.65 x 38.1, rotation 0
"\\grumpy\volt\howe\novel_devices\kit\pcbs\pogo_socket_pcb\240611_eurocircuits_panel_FINAL\pogo_socket_2port.PcbDoc" at 124,61, 2 rows x 1 columns, spacing 18 x 38.1, rotation 0
"10cm-chip-cal-board-1point2in\10cm-chip-cal-board-1point2in.PcbDoc" at 85,61, 6 rows x 1 columns, spacing 18 x 39, rotation 0
"10cm-chip-cal-board-1point2in\10cm-chip-cal-board-1point2in.PcbDoc" at 46,61, 6 rows x 1 columns, spacing 18 x 39, rotation 0
"thru-cal-board-1point2in\thru-cal-board-1point2in.PcbDoc" at 163,7, 9 rows x 1 columns, spacing 18 x 39, rotation 0
"load-cal-board-1point2in\load-cal-board-1point2in.PcbDoc" at 124,7, 3 rows x 1 columns, spacing 18 x 39, rotation 0
"open-cal-board-1point2in\open-cal-board-1point2in.PcbDoc" at 85,7, 3 rows x 1 columns, spacing 18 x 39, rotation 0
"short-cal-board-1point2in\short-cal-board-1point2in.PcbDoc" at 46,7, 3 rows x 1 columns, spacing 18 x 39, rotation 0
"10cm-chip-cal-board-1point2in\10cm-chip-cal-board-1point2in.PcbDoc" at 7,7, 9 rows x 1 columns, spacing 18 x 39, rotation 0